# EAGLE board without_solar (EAGLE 9.4.2)
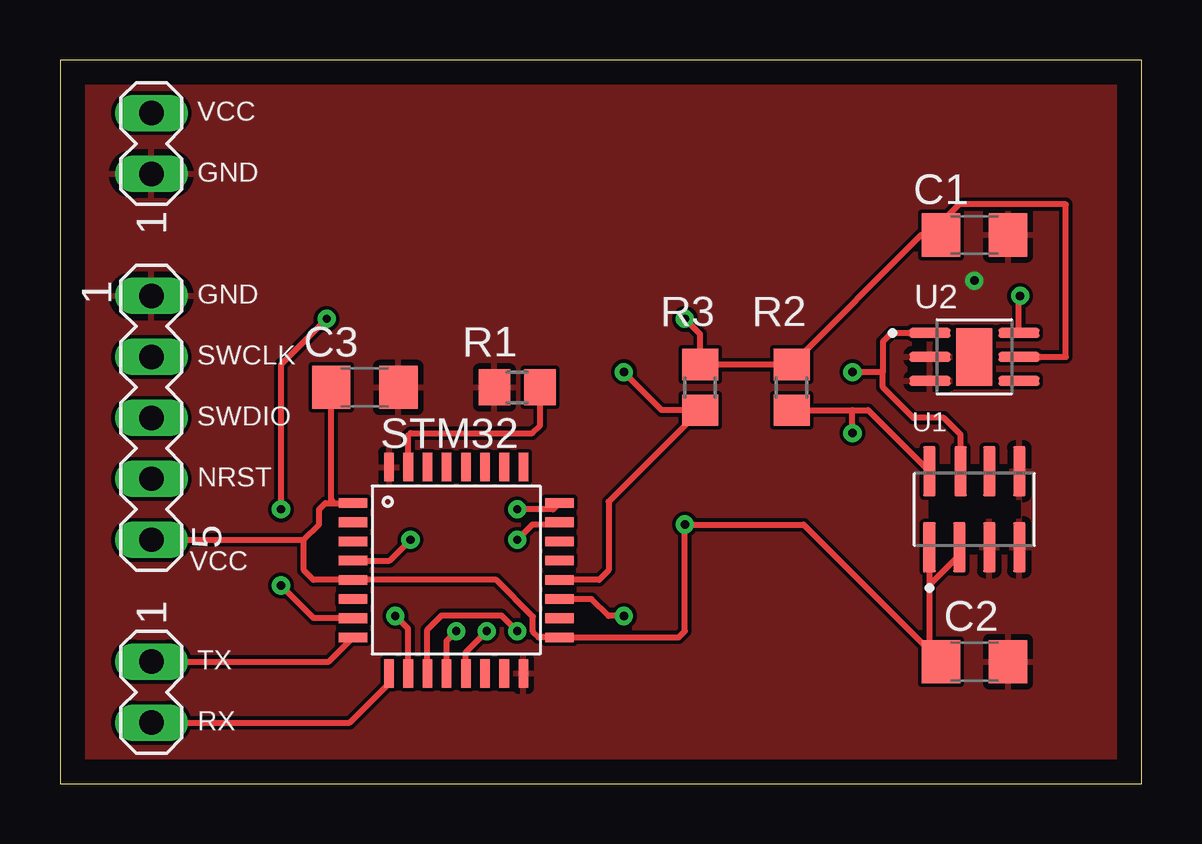
[diagram p0: board, top side]
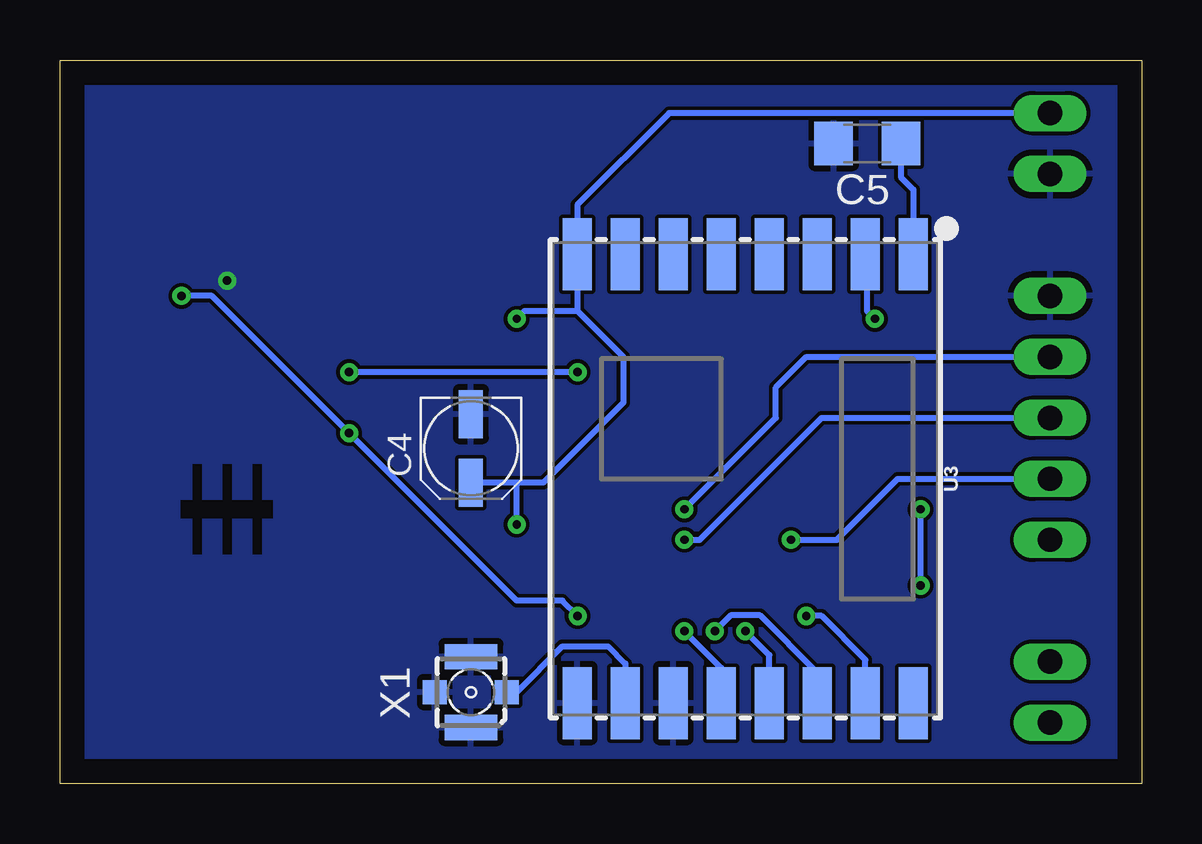
[diagram p1: board, bottom side, seen from below]

Size 45.06 x 30.15 mm. Coordinates in mm from the lower left corner, seen from the top.
Outline: 0,0 45.06,0 45.06,30.15 0,30.15 0,0
Copper layers (1*16): Top 0.035mm / dielectric 1.5mm / Bottom 0.035mm
Design rules "default": minimum track width 6mil, minimum drill 0.35mm, track to track 6mil, track to pad 6mil, pad to pad 6mil, via to via 6mil, smd to smd 6mil, copper to edge 40mil, drill to drill 6mil, minimum pad ring 10mil, minimum via ring 8mil, stop-mask expansion 4mil, vias tented up to drill 0mil, thermal gap 10mil

## Footprints (pad centres in the part's own frame; a part is rotated, then mirrored left to right if it is on the bottom)
C1206 = smd 1.6 x 1.8: 1 -1.4,0; 2 1.4,0
UD-4X5,8_NICHICON = smd 2 x 1: + 1.425,0; - -1.425,0
R0805 = smd 1.3 x 1.5: 1 -0.95,0; 2 0.95,0
LQFP32-7X7 = smd 1.2 x 0.4: 1 -4.3,2.8; 2 -4.3,2; 3 -4.3,1.2; 4 -4.3,0.4; 5 -4.3,-0.4; 6 -4.3,-1.2; 7 -4.3,-2; 8 -4.3,-2.8; 17 4.3,-2.8; 18 4.3,-2; 19 4.3,-1.2; 20 4.3,-0.4; 21 4.3,0.4; 22 4.3,1.2; 23 4.3,2; 24 4.3,2.8 | smd 0.4 x 1.2: 9 -2.8,-4.3; 10 -2,-4.3; 11 -1.2,-4.3; 12 -0.4,-4.3; 13 0.4,-4.3; 14 1.2,-4.3; 15 2,-4.3; 16 2.8,-4.3; 25 2.8,4.3; 26 2,4.3; 27 1.2,4.3; 28 0.4,4.3; 29 -0.4,4.3; 30 -1.2,4.3; 31 -2,4.3; 32 -2.8,4.3
MA05-1 = drill 1.016 long: 1 -5.08,0; 2 -2.54,0; 3 0,0; 4 2.54,0; 5 5.08,0
MA02-1 = drill 1.016 long: 1 -2.54,0; 2 0,0
SON125P300X500X100-8N = smd 2.072 x 0.53: 1 -1.581,1.875; 2 -1.581,0.625; 3 -1.581,-0.625; 4 -1.581,-1.875; 5 1.581,-1.875; 6 1.581,-0.625; 7 1.581,0.574; 8 1.581,1.875
SON100P300X300X80-7N = smd 1.698 x 0.42: 1 -1.854,1; 2 -1.854,0; 3 -1.854,-1; 4 1.854,-1; 5 1.854,0; 6 1.854,1 | smd 1.5 x 2.4: 7 0,0
RFM69W-XXXS2 = smd 3 x 1.2: 1 -9.35,7; 2 -9.35,5; 3 -9.35,3; 4 -9.35,1; 5 -9.35,-1; 6 -9.35,-3; 7 -9.35,-5; 8 -9.35,-7; 9 9.35,-7; 10 9.35,-5; 11 9.35,-3; 12 9.35,-1; 13 9.35,1; 14 9.35,3; 15 9.35,5; 16 9.35,7
734120110 = smd 1 x 1: 1 0,-1.5; S@1 0,1.5 | smd 1.05 x 2.2: S@2 -1.475,0; S@3 1.475,0

## Placement (x,y rotation side)
C1  100n  [C1206]  38.1,22.86 0 top
C2  100n  [C1206]  38.1,5.08 0 top
C3  100n  [C1206]  12.7,16.51 0 top
C4  10u  [UD-4X5,8_NICHICON]  27.94,13.97 270 bottom
C5  100n  [C1206]  11.43,26.67 180 bottom
R1  10k  [R0805]  19.05,16.51 180 top
R2  10k  [R0805]  30.48,16.51 90 top
R3  10k  [R0805]  26.67,16.51 90 top
STM32  STM32L031K6  [LQFP32-7X7]  16.51,8.89 0 top
SV1  PROG  [MA05-1]  3.81,15.24 270 top
SV2  PWR  [MA02-1]  3.81,27.94 90 top
SV3  UART  [MA02-1]  3.81,2.54 270 top
U1  MS560702BA03-50  [SON125P300X500X100-8N]  38.1,11.43 90 top
U2  HDC2080DMBR  [SON100P300X300X80-7N]  38.1,17.78 0 top
U3  RFM69HW  [RFM69W-XXXS2]  16.51,12.7 270 bottom
X1  734120110  [734120110]  27.94,3.81 90 bottom

## Library data of the parts
C1-C5 = rcl; SPICEPREFIX: C
R1-R3 = rcl; SPICEPREFIX: R
STM32 SV2 SV3 = dp
SV1 = con-lstb; OC_FARNELL: unknown; OC_NEWARK: unknown
U1 = MS560702BA03-50; AVAILABILITY: Unavailable; COMMENT: MS560702BA03-50; DESCRIPTION: MS5607-02BA03 Series 3 V 1 to 120 kPa Absolute Barometric Pressure Sensor; EU_ROHS_COMPLIANCE: Compliant; MF: TE Connectivity; MP: MS560702BA03-50; PACKAGE: SMD-8 TE Connectivity; PRICE: None; TE_PURCHASE_URL: https://www.te.com/usa-en/product-MS560702BA03-50.html?te_bu=Cor&te_type=disp&te_campaign=seda_glo_cor-seda-global-disp-prtnr-fy19-seda-model-bom-cta_sma-317_1&elqCampaignId=32493
U2 = HDC2080DMBR2; AVAILABILITY: Unavailable; DESCRIPTION: Board Mount Humidity Sensors Low Power Humidity and Temperature Digital Sensor 6-WSON -40 to 85.; MF: Texas Instruments; MP: HDC2080DMBR; PACKAGE: WDFN-6 Texas Instruments; PRICE: None
U3 = SparkFun-RF
X1 = con-coax

## Nets
GND: C1.2 C2.2 C3.2 C4.- C5.2 R1.2 STM32.16 STM32.32 SV1.1 SV2.1 U1.3 U1.4 U1.5 U2.2 U2.3 U3.9 U3.11 X1.S@1 X1.S@2 X1.S@3
I2C_SCL: R2.1 STM32.19 U1.8 U2.6
I2C_SDA: R3.1 STM32.20 U1.7 U2.1
N$1: R1.1 STM32.31
N$2: U3.10 X1.1
N$10: C5.1 U3.1
NRST: STM32.4 SV1.4
RFM_INT: STM32.7 U3.2
SPI_MISO: STM32.12 U3.13
SPI_MOSI: STM32.13 U3.14
SPI_NSS: STM32.10 U3.15
SPI_SCK: STM32.11 U3.12
SWCLK: STM32.24 SV1.2
SWDIO: STM32.23 SV1.3
UART_RX: STM32.9 SV3.2
UART_TX: STM32.8 SV3.1
VCC: C1.1 C2.1 C3.1 C4.+ R2.2 R3.2 STM32.1 STM32.5 STM32.17 SV1.5 SV2.2 U1.1 U1.2 U2.5 U3.8

## Tracks (layer width: path | path; a pad name or v marks a point on that pad's centre or on a via)
GND  (via drill 0.35)
  Top 0.254: 13.71,16.12 C3.2
  other vias: 38.1,20.95
  pour Bottom: 0,30.16 0,0 45.09,0 45.09,30.16
  pour Top: 0,30.16 45.09,30.16 45.09,0 0,0
I2C_SCL  (via drill 0.35)
  Top 0.254: R2.1 33.02,15.56 | 33.02,15.56 33.68,15.56 U1.8 | v33.02,14.61 33.02,15.56 | U2.6 39.95,20.27 v40.01,20.32 | v23.5,6.99 22.86,6.99 22.16,7.69 STM32.19
  Bottom 0.254: v40.01,20.32 38.73,20.32 v33.02,14.61 26.04,7.62 24.13,7.62 v23.5,6.99
I2C_SDA  (via drill 0.35)
  Top 0.254: U1.7 37.53,14.54 36.83,15.24 35.56,15.24 34.29,16.51 34.29,17.14 | 34.29,17.14 34.29,18.41 34.66,18.78 U2.1 | 34.29,17.14 v33.02,17.14 | STM32.20 22.46,8.49 22.86,8.89 22.86,11.75 R3.1 25.08,15.56 v23.5,17.14
  Bottom 0.254: v23.5,17.14 v33.02,17.14
N$1
  Top 0.254: STM32.31 14.51,14.51 14.61,14.61 19.68,14.61 20,14.92 R1.1
N$2
  Bottom 0.254: X1.1 26.04,3.81 24.13,5.71 22.23,5.71 21.51,5 U3.10
N$10
  Bottom 0.254: C5.1 10.03,25.27 9.51,24.75 U3.1
NRST  (via drill 0.35)
  Top 0.254: STM32.4 13.73,9.29 v14.61,10.16
  Bottom 0.254: v14.61,10.16 12.7,10.16 10.16,12.7 SV1.4
RFM_INT  (via drill 0.35)
  Top 0.254: STM32.7 10.57,6.89 v9.21,8.26 | v11.11,19.37 9.21,17.46 v9.21,11.43
  Bottom 0.254: v11.11,19.37 11.43,19.68 11.43,21.97 U3.2 | v9.21,8.26 v9.21,11.43
SPI_MISO  (via drill 0.35)
  Top 0.254: STM32.12 16.11,5.95 v16.51,6.35
  Bottom 0.254: U3.13 15.51,5.35 v16.51,6.35
SPI_MOSI  (via drill 0.35)
  Top 0.254: STM32.13 16.91,5.48 v17.78,6.35
  Bottom 0.254: U3.14 13.51,4.62 15.9,7.01 17.12,7.01 v17.78,6.35
SPI_NSS  (via drill 0.35)
  Top 0.254: STM32.10 14.51,6.45 v13.97,6.99
  Bottom 0.254: U3.15 11.51,5.16 13.34,6.99 v13.97,6.99
SPI_SCK  (via drill 0.35)
  Top 0.254: STM32.11 15.31,6.42 15.9,7.01 18.39,7.01 v19.05,6.35
  Bottom 0.254: U3.12 17.51,4.81 v19.05,6.35
SWCLK  (via drill 0.35)
  Top 0.254: STM32.24 20.55,11.43 v19.05,11.43
  Bottom 0.254: v19.05,11.43 15.24,15.24 15.24,16.51 13.97,17.78 SV1.2
SWDIO  (via drill 0.35)
  Top 0.254: STM32.23 20.71,10.79 19.68,10.79 v19.05,10.16
  Bottom 0.254: v19.05,10.16 18.41,10.16 13.34,15.24 SV1.3
UART_RX
  Top 0.254: SV3.2 12.06,2.54 13.71,4.18 STM32.9
UART_TX
  Top 0.254: STM32.8 11.2,5.08 SV3.1
VCC  (via drill 0.35)
  Top 0.254: SV1.5 10.16,10.16 | 10.16,10.16 10.79,10.79 10.79,11.43 11.05,11.69 11.43,11.69 | 11.43,11.69 STM32.1 | 10.16,10.16 10.16,8.89 10.56,8.49 STM32.5 18.18,8.49 19.71,6.96 19.71,6.33 19.95,6.09 STM32.17 25.77,6.09 26.04,6.35 v26.04,10.79 30.98,10.79 C2.1 36.23,5.55 36.23,8.26 | 11.43,11.69 11.3,11.82 C3.1 | 36.2,22.86 35.88,22.86 R2.2 R3.2 26.67,18.73 v26.04,19.37 | 36.2,22.86 C1.1 | U2.5 41.91,17.78 41.91,24.13 37.47,24.13 36.2,22.86 | U1.1 36.23,8.26 | U1.2 37.48,9.51 36.23,8.26
  Bottom 0.254: 23.51,19.7 U3.8 23.51,24.11 19.68,27.94 SV2.2 | 26.04,12.54 24.92,12.54 21.59,15.88 21.59,17.78 23.51,19.7 | 26.04,12.54 C4.+ | v26.04,10.79 26.04,12.54 | v26.04,19.37 25.7,19.7 23.51,19.7

## Text on the board
tNames: VCC | GND | GND | SWCLK | SWDIO | NRST | VCC | TX | RX